# EAGLE board BatteryCharging (EAGLE 9.6.2)
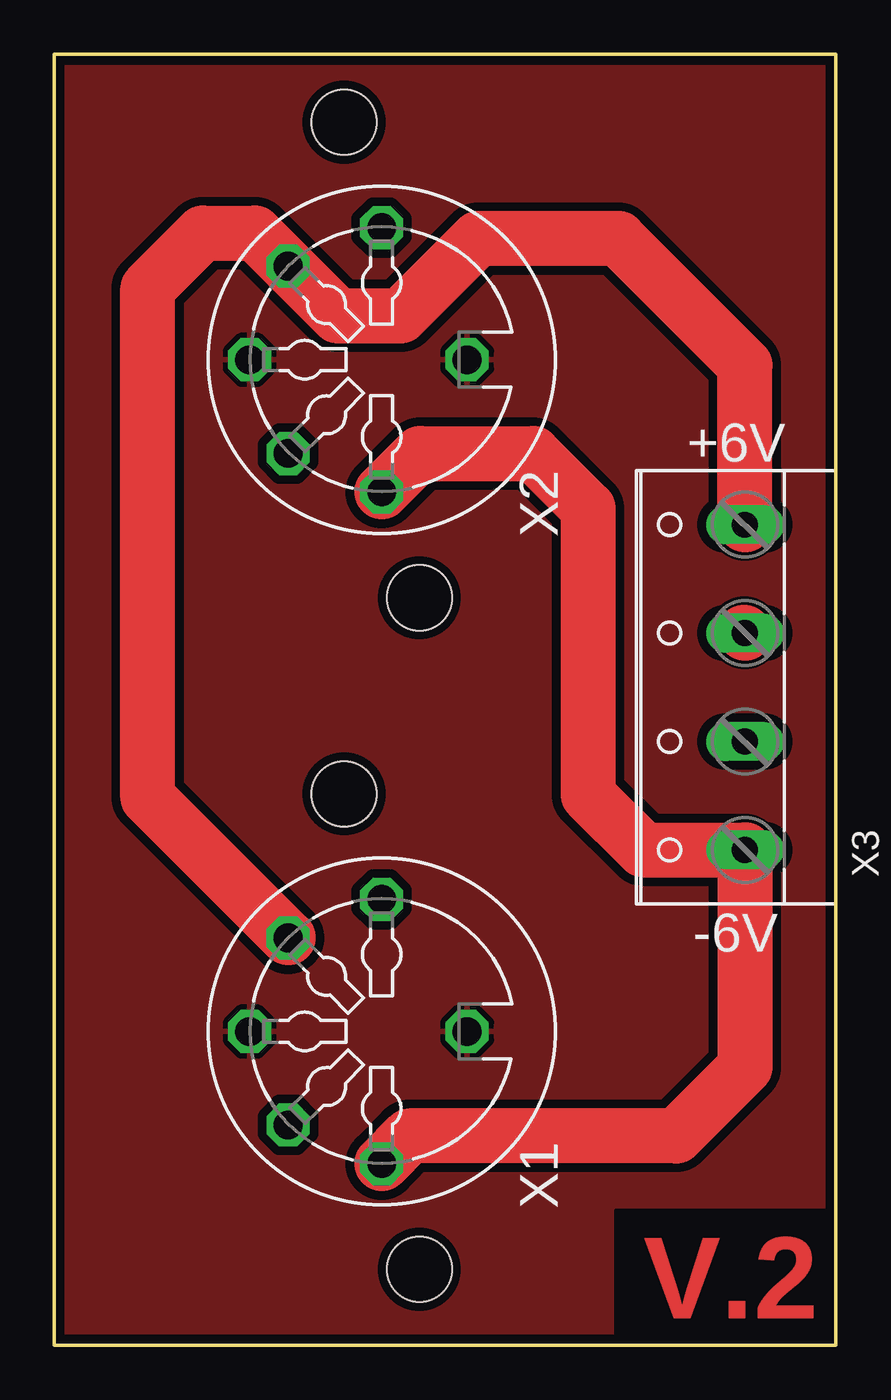
[diagram p0: board, top side]
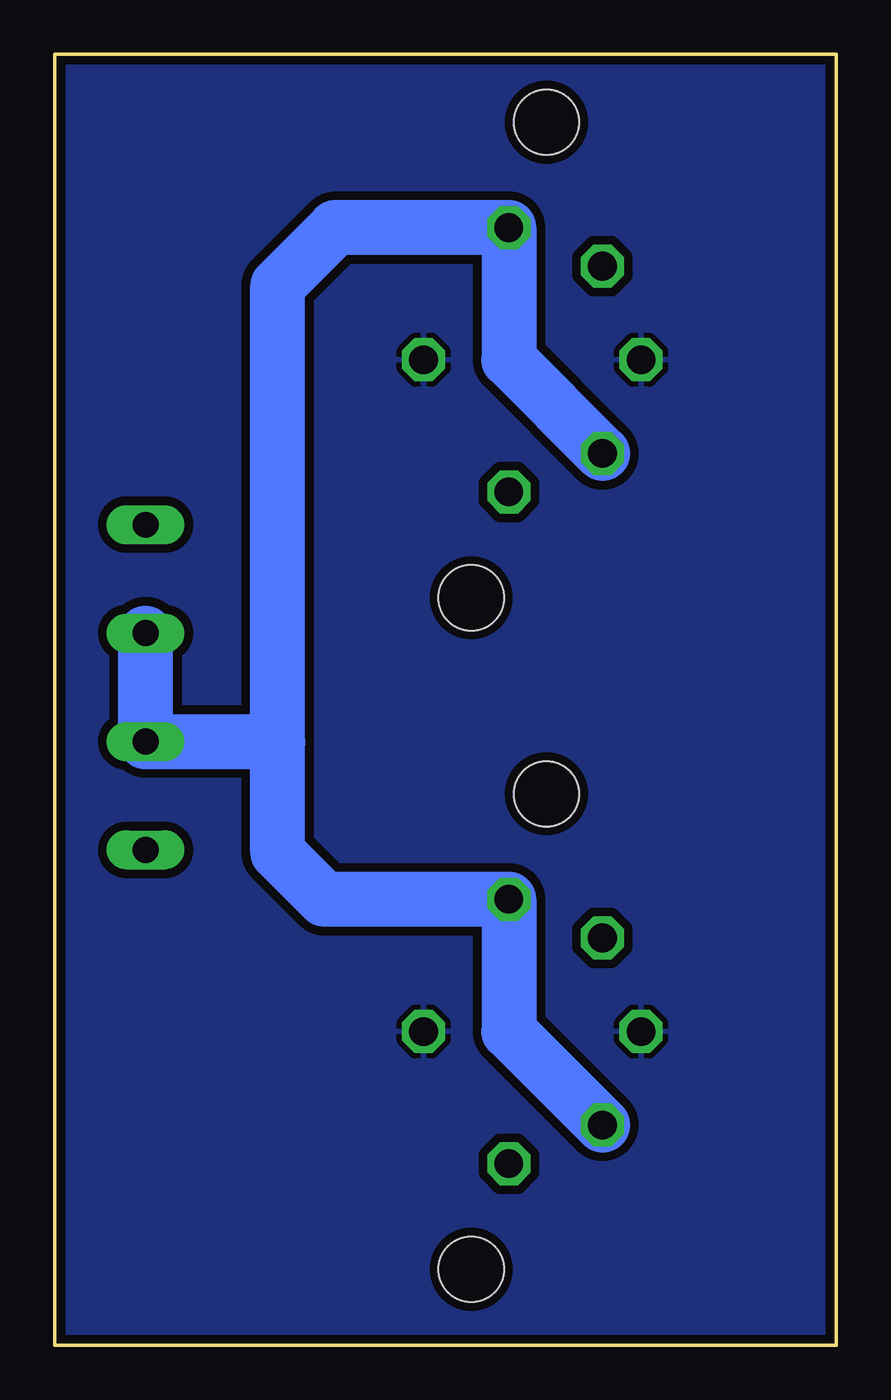
[diagram p1: board, bottom side, seen from below]

Size 36.07 x 59.56 mm. Coordinates in mm from the lower left corner, seen from the top.
Outline: 0,0 0,59.56 36.07,59.56 36.07,0 0,0
Copper layers (1*16): Top 0.035mm / dielectric 1.5mm / Bottom 0.035mm
Design rules "SparkFun": minimum track width 8mil, minimum drill 20mil, track to track 8mil, track to pad 8mil, pad to pad 8mil, via to via 8mil, smd to smd 8mil, copper to edge 8mil, drill to drill 8mil, minimum pad ring 12mil, minimum via ring 10mil, stop-mask expansion 4mil, vias tented up to drill 20mil, thermal gap 10mil
Holes 3 mm at 16.85,3.51 13.38,25.44 16.85,34.48 13.38,56.43

## Footprints (pad centres in the part's own frame; a part is rotated, then mirrored left to right if it is on the bottom)
MAB5SV = drill 1.321 octagon: 1 6.096,0; 2 0,-6.096; 3 -6.096,0; 4 4.318,-4.318; 5 -4.318,-4.318; PE 0,3.937
W237-4 = drill 1.194 long: 1 -7.5,-1.27; 2 -2.5,-1.27; 3 2.5,-1.27; 4 7.5,-1.27

## Placement (x,y rotation side)
X1  MAB5SV  [MAB5SV]  15.11,14.48 270 top
X2  MAB5SV  [MAB5SV]  15.11,45.47 270 top
X3  [W237-4]  30.61,30.35 90 top

## Library data of the parts
X1 X2 = con-hirschmann; OC_FARNELL: unknown; OC_NEWARK: unknown
X3 = con-wago-500; OC_FARNELL: unknown; OC_NEWARK: unknown

## Nets
0V: X1.3 X1.4 X2.3 X2.4 X3.2 X3.3
+6V: X1.5 X2.5 X3.4
-6V: X1.1 X2.1 X3.1
GND: X1.2 X1.PE X2.2 X2.PE

## Tracks (layer width: path | path; a pad name or v marks a point on that pad's centre or on a via)
0V
  Top 2.54: 31.84,32.89 X3.3
  Bottom 2.54: 25.78,27.81 25.78,22.73 23.62,20.57 X1.3 15.11,14.48 X1.4 | 25.78,27.81 25.78,48.89 23.11,51.56 X2.3 15.11,45.47 X2.4 | 25.78,27.81 25.82,27.85 X3.2 X3.3
+6V
  Top 2.54: X1.5 4.32,25.27 4.32,48.77 6.86,51.31 9.27,51.31 X2.5 13.08,47.5 16,47.5 19.56,51.05 26.04,51.05 31.88,45.21 X3.4
-6V
  Top 2.54: X1.1 16.38,9.65 28.7,9.65 31.88,12.83 X3.1 27.18,22.85 24.64,25.39 24.64,38.61 22.1,41.15 16.89,41.15 X2.1
CUTOUT
  cutout Top: 25.91,6.22 25.91,-0.76 37.34,-0.76 37.34,6.22
GND
  pour Top (isolate 0.406): 0,59.56 36.07,59.56 36.07,0 0,0
  pour Bottom (isolate 0.406): 0,59.56 36.07,59.56 36.07,0 0,0

## Text on the board
Top: V.2
tPlace: +6V | -6V